# Altium PCB STM32.PcbDoc (part 8 of 10)
Units mil, origin at the board's own origin, x right, y up, seen from the top; angles counter-clockwise.
Board outline 3925 x 3925 mil, 2 copper layers (Top Layer, Bottom Layer); 152 components, 142 nets, 670 pads, 189 vias.
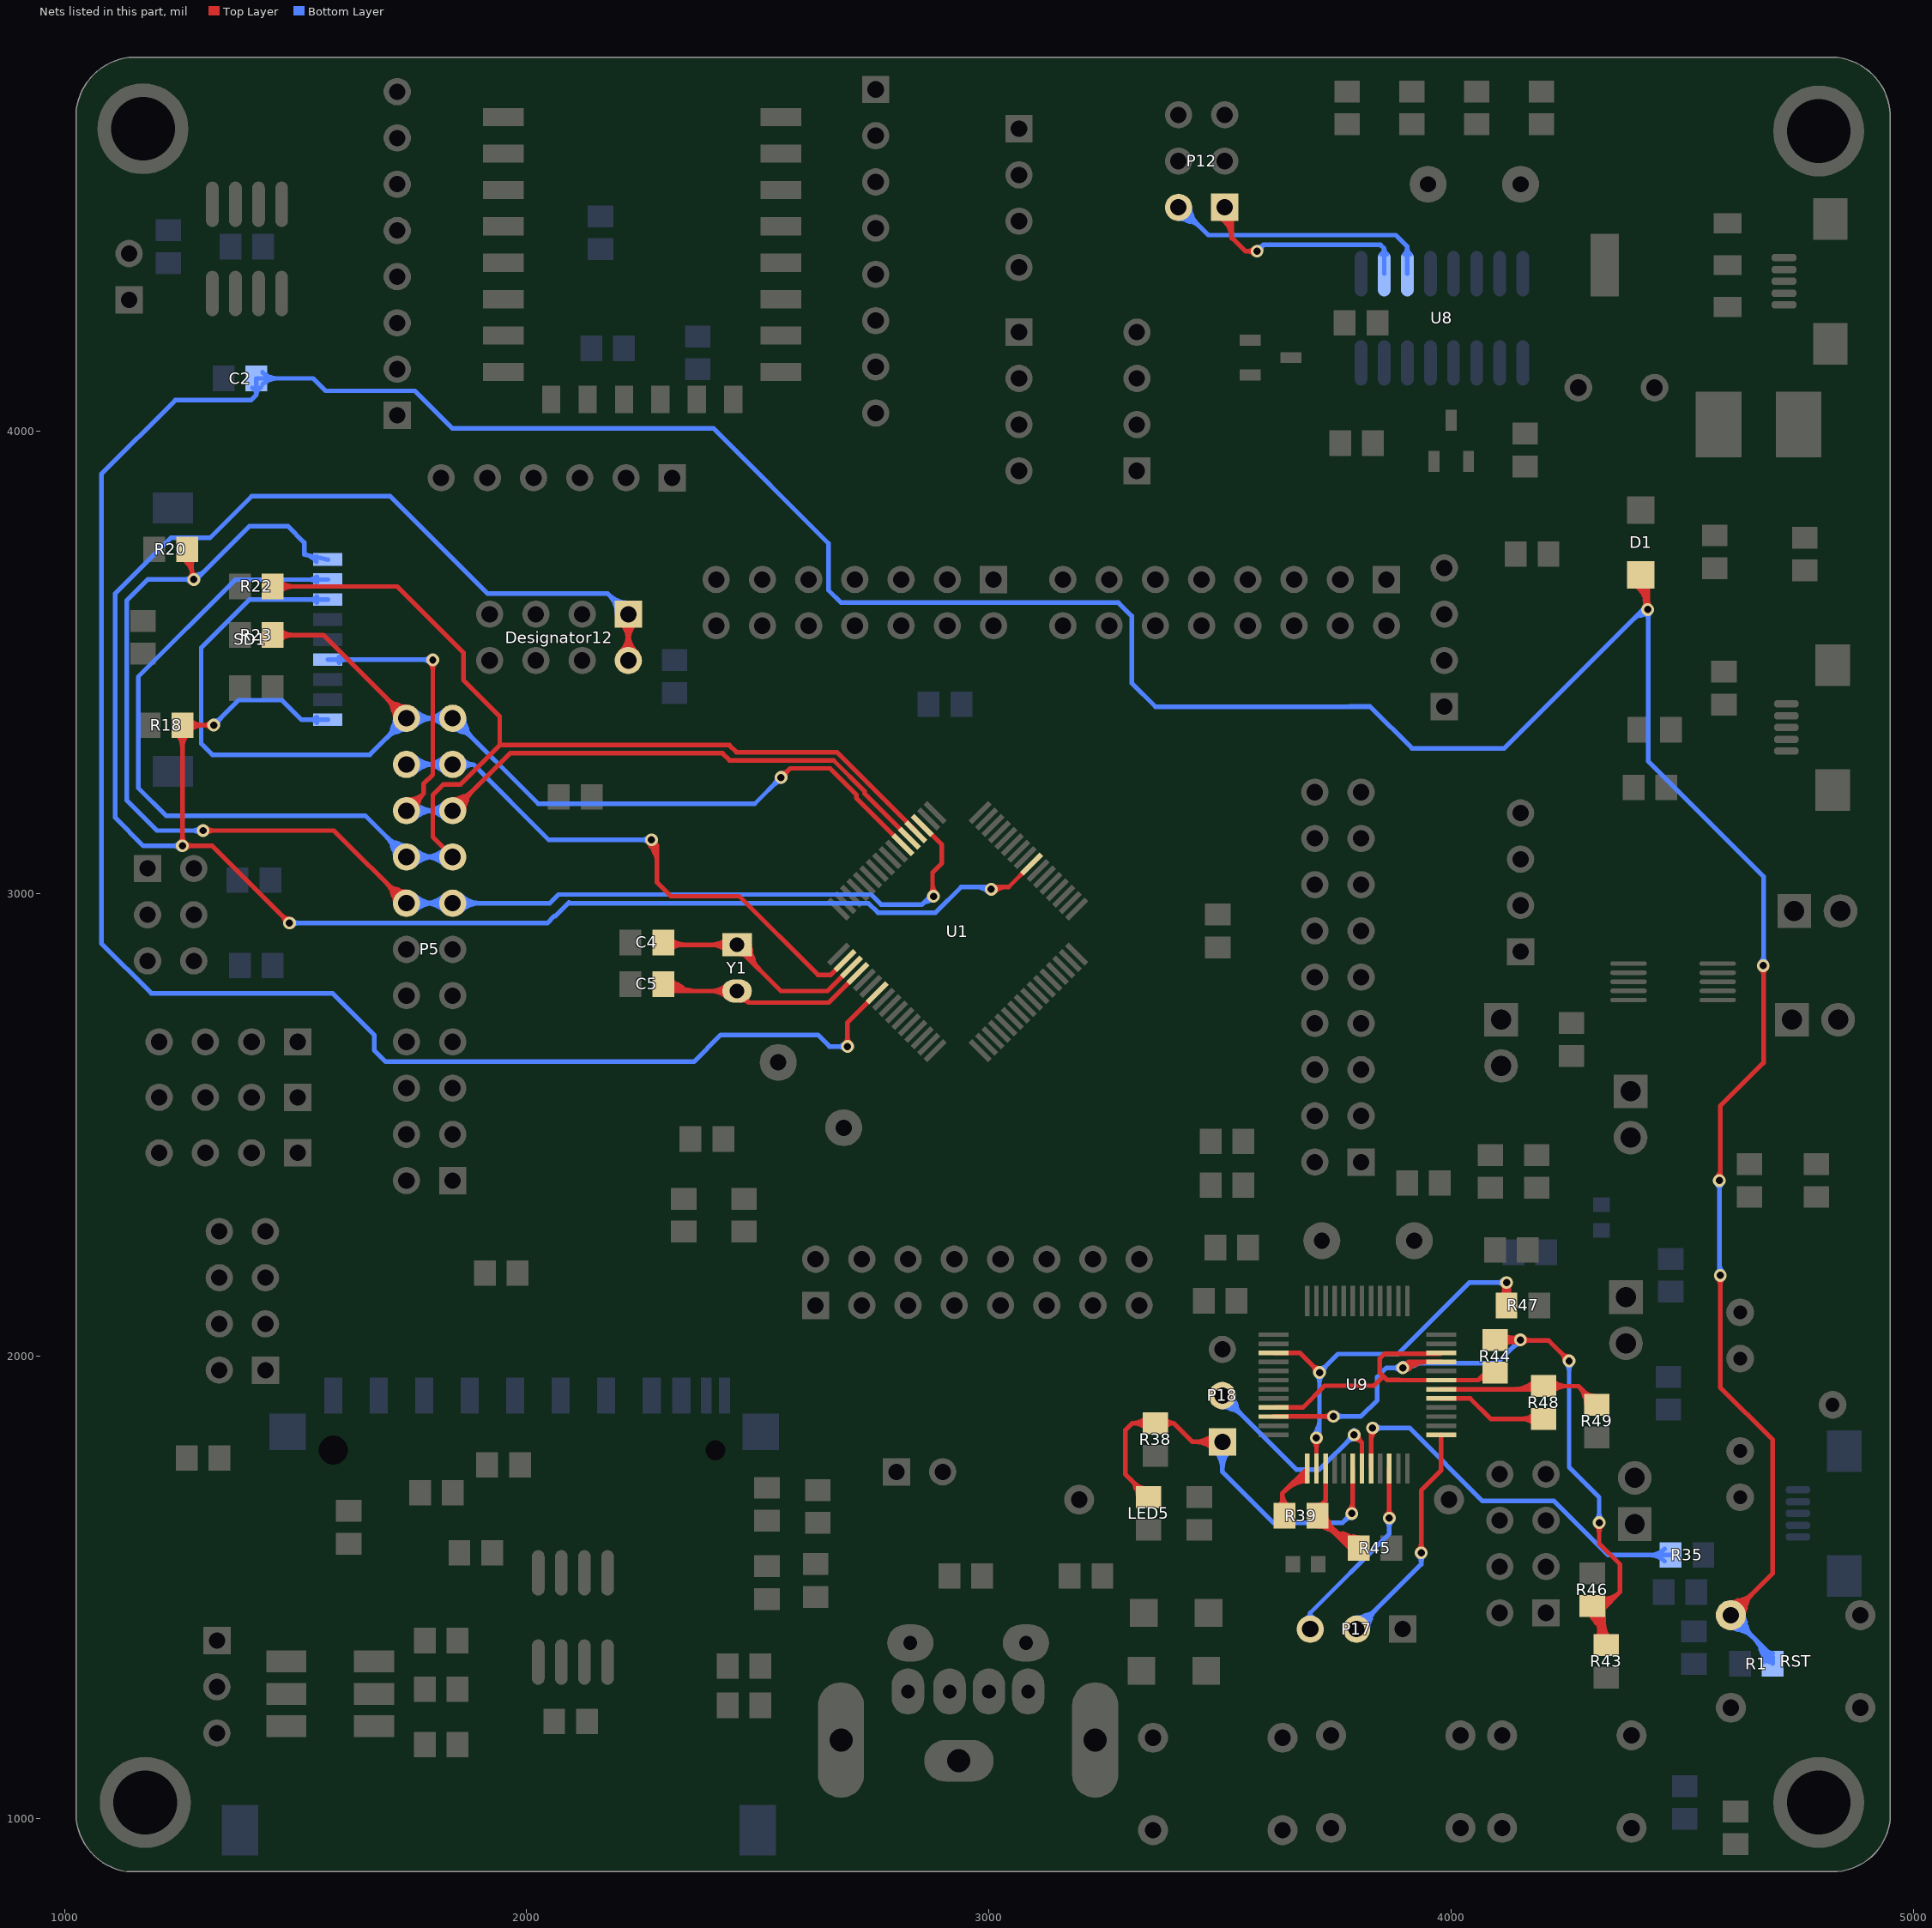
[diagram p8: the nets of this part, all layers, seen from the top]

## Via types
v1: diameter 27.56, hole 15.75, Top Layer to Bottom Layer, tented both sides, 185 vias
v2: diameter 39.37, hole 23.62, Top Layer to Bottom Layer, tented both sides, 3 vias
v3: diameter 39.37, hole 27.56, Top Layer to Bottom Layer, tented both sides, 1 vias

## Nets (pads, with @x,y where several pads share a name; then routed paths per layer and width w, separated by ;. In a path a pad name is that pad's centre, name@x,y a point inside that pad or via, vN(x,y) a via of type N, cw(c..) or ccw(c..) an arc to the next point about the centre after c; other vN are vias at no path point) (continued)
PC9: Designator12.1 Designator12.2 R18.2 SD1.8 U1.40 | length 5851.6
  Top Layer w10: R18.2@1242.27,3347.9 cw(c1210.48,3316.11) 1255.43,3316.11 cw(c1300.39,3316.11) R18.2@1268.6,3347.9 ; v1@1249.23,3110.21 ccw(c1234.24,3125.2) 1255.43,3125.2 ccw(c1276.63,3125.2) 1261.64,3110.21 ccw(c1276.63,3125.2) 1276.63,3104 ccw(c1276.63,3082.8) v1@1261.64,3097.79 ; R18.2@1268.6,3351.83 cw(c1300.39,3320.04) 1300.39,3365 cw(c1300.39,3409.96) R18.2@1268.6,3378.17 ; v1(1323,3365) R18.2@1255.43,3365 v1(1255.43,3104) 1320,3104 v1(1487,2937) ; 1475.77,2946.15 ccw(c1489.64,2949.87) v1@1486.76,2935.8 ; 1477.85,2948.23 cw(c1474.13,2934.36) v1@1488.2,2937.24 ; Designator12.2@2202.66,3522.34 ccw(c2160.79,3564.21) 2220,3564.21 ccw(c2279.21,3564.21) Designator12.2@2237.34,3522.34 ; Designator12.1@2202.66,3587.66 cw(c2160.79,3545.79) 2220,3545.79 cw(c2279.21,3545.79) Designator12.1@2237.34,3587.66 ; Designator12.2@2209.73,3515.27 ccw(c2184.93,3540.07) 2220,3540.07 ccw(c2255.07,3540.07) Designator12.2@2230.27,3515.27 ; Designator12.1@2209.73,3594.73 cw(c2184.93,3569.93) 2220,3569.93 cw(c2255.07,3569.93) Designator12.1@2230.27,3594.73 ; Designator12.2@2220,3505 Designator12.1@2220,3605 ; v1@3003,3015 3042.71,3015 U1.40@3092.58,3064.87 ; 1301.8,3365 ccw(c1301.8,3386.2) 1316.79,3371.21 cw(c1301.8,3386.2) 1301.8,3365 ; 1301.8,3365 cw(c1301.8,3343.8) 1316.79,3358.79 ccw(c1301.8,3343.8) 1301.8,3365 ; 1472.01,2951.99 ccw(c1487,2966.98) 1487,2945.78 cw(c1487,2966.98) 1472.01,2951.99 ; 1472.01,2951.99 cw(c1457.02,2937) 1478.22,2937 ccw(c1457.02,2937) 1472.01,2951.99 ; v1@3011.21,3003.79 cw(c3038.27,2976.73) 3038.27,3015 ; v1@3011.21,3003.79 cw(c3038.27,2976.73) 3038.27,3015 ; v1@3011.21,3003.79 cw(c3038.27,2976.73) 3038.27,3015
  Bottom Layer w10: v1@1249.23,3097.79 ccw(c1234.24,3082.8) 1234.24,3104 ccw(c1234.24,3125.2) v1@1249.23,3110.21 ; v1(1255.43,3104) 1171,3104 1110,3165 1110,3650 1230,3770 1315,3770 1405,3860 1705,3860 1915,3650 2175,3650 Designator12.1@2220,3605 ; v1(1323,3365) 1377,3419 1470.77,3419 1513,3376.77 SD1.8@1570,3376.77 ; v1(1487,2937) 2045,2937 2060,2952 2062,2952 2091.26,2981.26 2092.52,2980 2739.18,2980 2759.76,2959.42 2884.42,2959.42 2940,3015 v1@3003,3015 ; Designator12.1@2195.47,3605 ccw(c2136.26,3605) 2178.13,3646.87 ccw(c2220,3688.74) Designator12.1@2220,3629.53 ; Designator12.1@2205.47,3605 ccw(c2170.4,3605) 2195.2,3629.8 ccw(c2220,3654.6) Designator12.1@2220,3619.53 ; 1337.99,3379.99 ccw(c1352.98,3365) 1331.78,3365 cw(c1352.98,3365) 1337.99,3379.99 ; 1337.99,3379.99 cw(c1323,3394.98) 1323,3373.78 ccw(c1323,3394.98) 1337.99,3379.99 ; 1508.2,2937 ccw(c1508.2,2915.8) 1493.21,2930.79 cw(c1508.2,2915.8) 1508.2,2937 ; 1508.2,2937 cw(c1508.2,2958.2) 1493.21,2943.21 ccw(c1508.2,2958.2) 1508.2,2937 ; 1531.09,3376.77 ccw(c1531.09,3397.97) 1546.08,3382.98 cw(c1531.09,3397.97) 1531.09,3376.77 ; 1531.09,3376.77 cw(c1531.09,3355.58) 1546.08,3370.56 ccw(c1531.09,3355.58) 1531.09,3376.77 ; 2971.73,3015 cw(c2971.73,2976.73) 2998.79,3003.79 ccw(c2971.73,2976.73) 2971.73,3015
  other v1: 3005,3010
PC10: P5.13 P5.14 R20.2 SD1.9 U1.51 | length 5014.2
  Top Layer w10: R20.2@1265.43,3745 v1(1280,3680) ; v1(1300,3137) 1583,3137 P5.14@1740,2980 ; v1@1306.21,3130.79 cw(c1321.2,3115.8) 1321.2,3137 cw(c1321.2,3158.2) v1@1306.21,3143.21 ; 1709.48,3002.35 ccw(c1746.61,3012.3) P5.14@1738.9,2974.64 ; 1717.65,3010.52 cw(c1707.7,2973.39) P5.14@1745.36,2981.1 ; U1.51@2855.95,3148.39 2898.26,3106.08 2898.26,3066.55 2878,3046.29 v1@2878,3000 ; 1275.37,3700.68 ccw(c1296.05,3705.32) 1284.7,3687.42 cw(c1296.05,3705.32) 1275.37,3700.68 ; 1275.37,3700.68 cw(c1254.68,3696.05) 1272.58,3684.7 ccw(c1254.68,3696.05) 1275.37,3700.68 ; 1698.13,3021.87 ccw(c1740,3063.74) 1740,3004.53 cw(c1740,3063.74) 1698.13,3021.87 ; 1698.13,3021.87 cw(c1656.26,2980) 1715.47,2980 ccw(c1656.26,2980) 1698.13,3021.87 ; 1715.2,3004.8 ccw(c1740,3029.6) 1740,2994.53 cw(c1740,3029.6) 1715.2,3004.8 ; 1715.2,3004.8 cw(c1690.4,2980) 1725.47,2980 ccw(c1690.4,2980) 1715.2,3004.8 ; R20.2@1255.46,3725.33 cw(c1229.82,3684.88) 1276.56,3695.35 ccw(c1229.82,3684.88) R20.2@1255.46,3725.33 ; 1275.65,3699.41 cw(c1316.65,3708.6) 1281.16,3731.09 ccw(c1316.65,3708.6) 1275.65,3699.41 ; v1@2873.79,3001.21 ccw(c2863.63,3011.37) 2878,3011.37 cw(c2863.63,3011.37) v1@2873.79,3001.21 ; 2878,3021.02 ccw(c2906.02,3021.02) 2886.21,3001.21 cw(c2906.02,3021.02) 2878,3021.02
  Bottom Layer w10: v1@1278.86,3680.45 cw(c1296.63,3673.48) 1291.69,3691.91 ; v1@1293.79,3130.79 ccw(c1278.8,3115.8) 1278.8,3137 ccw(c1278.8,3158.2) v1@1293.79,3143.21 ; v1(1300,3137) 1200,3137 1135,3202 1135,3635 1180,3680 v1(1280,3680) 1285,3680 1400,3795 1484,3795 1519,3760 1519,3734.23 SD1.9@1570,3723.23 ; 1532.5,3729.7 ccw(c1539.43,3737.35) SD1.9@1546.37,3729.72 ; P5.14@1740,2980 P5.13@1840,2980 2050,2980 2068.74,2998.74 2611.26,2998.74 2611.33,2998.67 2745.23,2998.67 2763.9,2980 2767,2976.9 2854.9,2976.9 ; v1@2878,3000 2854.9,2976.9 ; 1258.8,3680 ccw(c1258.8,3701.2) 1273.79,3686.21 cw(c1258.8,3701.2) 1258.8,3680 ; 1258.8,3680 cw(c1258.8,3658.8) 1273.79,3673.79 ccw(c1258.8,3658.8) 1258.8,3680 ; 1775.07,2980 ccw(c1775.07,2944.93) 1750.27,2969.73 cw(c1775.07,2944.93) 1775.07,2980 ; 1775.07,2980 cw(c1775.07,3015.07) 1750.27,2990.27 ccw(c1775.07,3015.07) 1775.07,2980 ; 1780.79,2980 ccw(c1780.79,3039.21) 1822.66,2997.34 cw(c1780.79,3039.21) 1780.79,2980 ; 1780.79,2980 cw(c1780.79,2920.79) 1822.66,2962.66 ccw(c1780.79,2920.79) 1780.79,2980 ; 1799.21,2980 ccw(c1799.21,2920.79) 1757.34,2962.66 cw(c1799.21,2920.79) 1799.21,2980 ; 1799.21,2980 cw(c1799.21,3039.21) 1757.34,2997.34 ccw(c1799.21,3039.21) 1799.21,2980 ; 1804.93,2980 ccw(c1804.93,3015.07) 1829.73,2990.27 cw(c1804.93,3015.07) 1804.93,2980 ; 1804.93,2980 cw(c1804.93,2944.93) 1829.73,2969.73 ccw(c1804.93,2944.93) 1804.93,2980 ; 1875.07,2980 ccw(c1875.07,2944.93) 1850.27,2969.73 cw(c1875.07,2944.93) 1875.07,2980 ; 1875.07,2980 cw(c1875.07,3015.07) 1850.27,2990.27 ccw(c1875.07,3015.07) 1875.07,2980 ; 1899.21,2980 ccw(c1899.21,2920.79) 1857.34,2962.66 cw(c1899.21,2920.79) 1899.21,2980 ; 1899.21,2980 cw(c1899.21,3039.21) 1857.34,2997.34 ccw(c1899.21,3039.21) 1899.21,2980 ; 2854.9,2976.9 cw(c2877.58,2954.22) v1@2879.48,2986.24 ; 2854.9,2976.9 cw(c2877.58,2954.22) v1@2879.48,2986.24 ; 2854.9,2976.9 cw(c2877.58,2954.22) v1@2879.48,2986.24 ; v1@1280,3688.78 ccw(c1280,3722.05) 1303.52,3698.52 cw(c1280,3722.05) v1@1280,3688.78 ; 1523.54,3733.25 cw(c1516.38,3700.06) 1544.91,3718.47 ccw(c1516.38,3700.06) 1523.54,3733.25 ; 2865.78,2983.42 ccw(c2861.14,3006.01) 2881.05,2994.38 cw(c2861.14,3006.01) 2865.78,2983.42
  other v1: 2880,2995
PC11: P5.15 P5.16 R22.2 SD1.1 U1.52 | length 4685.7
  Top Layer w10: R22.2@1450.43,3665 1720,3665 1862.99,3522.01 1862.99,3462.99 1941.79,3384.2 1941.79,3321.79 ; P5.15@1840,3080 1797,3123 1797,3214 1820,3237 1857,3237 1941.79,3321.79 ; U1.52@2842.03,3134.47 2842.03,3135.88 2671.39,3306.52 2453.58,3306.52 2438.31,3321.79 1941.79,3321.79 ; 1495.39,3665 ccw(c1495.39,3620.04) 1463.6,3651.83 cw(c1495.39,3620.04) 1495.39,3665 ; 1495.39,3665 cw(c1495.39,3709.96) 1463.6,3678.17 ccw(c1495.39,3709.96) 1495.39,3665
  Bottom Layer w10: SD1.1@1570,3679.92 1369.92,3679.92 1160,3470 1160,3229.11 1220,3169.11 1650.89,3169.11 P5.16@1740,3080 P5.15@1840,3080 ; 1709.48,3102.35 ccw(c1746.61,3112.3) P5.16@1738.9,3074.64 ; 1717.65,3110.52 cw(c1707.7,3073.39) P5.16@1745.36,3081.1 ; 1531.09,3679.92 ccw(c1531.09,3701.12) 1546.08,3686.13 cw(c1531.09,3701.12) 1531.09,3679.92 ; 1531.09,3679.92 cw(c1531.09,3658.73) 1546.08,3673.71 ccw(c1531.09,3658.73) 1531.09,3679.92 ; 1698.13,3121.87 ccw(c1740,3163.74) 1740,3104.53 cw(c1740,3163.74) 1698.13,3121.87 ; 1698.13,3121.87 cw(c1656.26,3080) 1715.47,3080 ccw(c1656.26,3080) 1698.13,3121.87 ; 1715.2,3104.8 ccw(c1740,3129.6) 1740,3094.53 cw(c1740,3129.6) 1715.2,3104.8 ; 1715.2,3104.8 cw(c1690.4,3080) 1725.47,3080 ccw(c1690.4,3080) 1715.2,3104.8 ; 1775.07,3080 ccw(c1775.07,3044.93) 1750.27,3069.73 cw(c1775.07,3044.93) 1775.07,3080 ; 1775.07,3080 cw(c1775.07,3115.07) 1750.27,3090.27 ccw(c1775.07,3115.07) 1775.07,3080 ; 1780.79,3080 ccw(c1780.79,3139.21) 1822.66,3097.34 cw(c1780.79,3139.21) 1780.79,3080 ; 1780.79,3080 cw(c1780.79,3020.79) 1822.66,3062.66 ccw(c1780.79,3020.79) 1780.79,3080 ; 1799.21,3080 ccw(c1799.21,3020.79) 1757.34,3062.66 cw(c1799.21,3020.79) 1799.21,3080 ; 1799.21,3080 cw(c1799.21,3139.21) 1757.34,3097.34 ccw(c1799.21,3139.21) 1799.21,3080 ; 1804.93,3080 ccw(c1804.93,3115.07) 1829.73,3090.27 cw(c1804.93,3115.07) 1804.93,3080 ; 1804.93,3080 cw(c1804.93,3044.93) 1829.73,3069.73 ccw(c1804.93,3044.93) 1804.93,3080
PC12: P5.17 P5.18 SD1.5 U1.53 | length 3211.9
  Top Layer w10: P5.18@1740,3180 1777,3217 ; v1(1797,3506) 1797,3258 1777,3238 1777,3217 ; P5.17@1834.64,3181.1 cw(c1872.3,3173.39) 1862.35,3210.52 ; P5.17@1840,3180 1964.31,3304.31 2423.51,3304.31 2438.78,3289.04 2664.16,3289.04 2664.16,3288.75 2730.74,3222.16 2730.74,3217.93 U1.53@2828.12,3120.55 ; P5.17@1841.1,3174.64 ccw(c1833.39,3212.3) 1870.52,3202.35 ; 1761.91,3201.91 ccw(c1780.15,3183.68) 1754.47,3181.32 cw(c1780.15,3183.68) 1761.91,3201.91 ; 1761.91,3201.91 cw(c1743.68,3220.15) 1741.32,3194.47 ccw(c1743.68,3220.15) 1761.91,3201.91 ; 1777,3217 ccw(c1807.79,3186.21) 1764.43,3182.24 cw(c1807.79,3186.21) 1777,3217 ; 1777,3217 cw(c1746.21,3247.79) 1742.24,3204.43 ccw(c1746.21,3247.79) 1777,3217 ; 1797,3484.8 ccw(c1775.8,3484.8) 1790.79,3499.79 cw(c1775.8,3484.8) 1797,3484.8 ; 1797,3484.8 cw(c1818.2,3484.8) 1803.21,3499.79 ccw(c1818.2,3484.8) 1797,3484.8 ; 1864.8,3204.8 ccw(c1889.6,3180) 1854.53,3180 cw(c1889.6,3180) 1864.8,3204.8 ; 1864.8,3204.8 cw(c1840,3229.6) 1840,3194.53 ccw(c1840,3229.6) 1864.8,3204.8 ; 1881.87,3221.87 ccw(c1923.74,3180) 1864.53,3180 cw(c1923.74,3180) 1881.87,3221.87 ; 1881.87,3221.87 cw(c1840,3263.74) 1840,3204.53 ccw(c1840,3263.74) 1881.87,3221.87
  Bottom Layer w10: SD1.5@1570,3506.69 1796.31,3506.69 v1(1797,3506) ; P5.18@1740,3180 P5.17@1840,3180 ; 1608.91,3506.69 ccw(c1608.91,3485.5) 1593.92,3500.49 cw(c1608.91,3485.5) 1608.91,3506.69 ; 1608.91,3506.69 cw(c1608.91,3527.89) 1593.92,3512.9 ccw(c1608.91,3527.89) 1608.91,3506.69 ; 1775.07,3180 ccw(c1775.07,3144.93) 1750.27,3169.73 cw(c1775.07,3144.93) 1775.07,3180 ; 1775.07,3180 cw(c1775.07,3215.07) 1750.27,3190.27 ccw(c1775.07,3215.07) 1775.07,3180 ; 1780.79,3180 ccw(c1780.79,3239.21) 1822.66,3197.34 cw(c1780.79,3239.21) 1780.79,3180 ; 1780.79,3180 cw(c1780.79,3120.79) 1822.66,3162.66 ccw(c1780.79,3120.79) 1780.79,3180 ; 1799.21,3180 ccw(c1799.21,3120.79) 1757.34,3162.66 cw(c1799.21,3120.79) 1799.21,3180 ; 1799.21,3180 cw(c1799.21,3239.21) 1757.34,3197.34 ccw(c1799.21,3239.21) 1799.21,3180 ; 1804.93,3180 ccw(c1804.93,3215.07) 1829.73,3190.27 cw(c1804.93,3215.07) 1804.93,3180 ; 1804.93,3180 cw(c1804.93,3144.93) 1829.73,3169.73 ccw(c1804.93,3144.93) 1804.93,3180 ; 1774.13,3506.69 cw(c1774.13,3483.13) 1790.79,3499.79 ccw(c1774.13,3483.13) 1774.13,3506.69 ; 1777.48,3506.69 ccw(c1777.48,3525.52) 1790.79,3512.21 cw(c1777.48,3525.52) 1777.48,3506.69
PC13: P5.19 P5.20 U1.2 | length 2247.2
  Top Layer w10: 2268.88,3101.98 cw(c2282.32,3109.74) v1@2268.95,3117.62 ; v1@2268.89,3108.29 cw(c2266.82,3091.98) 2281.06,3100.2 ; v1(2270,3117) 2282.02,3104.98 ; 2277.45,3087.14 cw(c2299.28,3099.74) v1@2277.56,3112.54 ; v1@2278.48,3114.73 ccw(c2295.07,3110.28) 2280.2,3101.7 ; U1.2@2688.92,2856.08 2657.84,2825 2630,2825 2460,2995 2312,2995 2282.02,3024.98 2282.02,3104.98 ; 2282.02,3104.98 ccw(c2273.49,3096.45) 2271.47,3108.34 cw(c2273.49,3096.45) 2282.02,3104.98 ; 2282.02,3104.98 cw(c2290.55,3113.51) 2278.66,3115.53 ccw(c2290.55,3113.51) 2282.02,3104.98 ; v1@2263.79,3110.79 cw(c2219.79,3066.79) 2282.02,3066.79 ccw(c2219.79,3066.79) v1@2263.79,3110.79 ; v1@2270.86,3117.86 cw(c2243.93,3090.93) 2282.02,3090.93 ccw(c2243.93,3090.93) v1@2270.86,3117.86
  Bottom Layer w10: P5.20@1740,3280 P5.19@1840,3280 1885,3280 ; v1(2270,3117) 2048,3117 1885,3280 ; 1775.07,3280 ccw(c1775.07,3244.93) 1750.27,3269.73 cw(c1775.07,3244.93) 1775.07,3280 ; 1775.07,3280 cw(c1775.07,3315.07) 1750.27,3290.27 ccw(c1775.07,3315.07) 1775.07,3280 ; 1780.79,3280 ccw(c1780.79,3339.21) 1822.66,3297.34 cw(c1780.79,3339.21) 1780.79,3280 ; 1780.79,3280 cw(c1780.79,3220.79) 1822.66,3262.66 ccw(c1780.79,3220.79) 1780.79,3280 ; 1799.21,3280 ccw(c1799.21,3220.79) 1757.34,3262.66 cw(c1799.21,3220.79) 1799.21,3280 ; 1799.21,3280 cw(c1799.21,3339.21) 1757.34,3297.34 ccw(c1799.21,3339.21) 1799.21,3280 ; 1804.93,3280 ccw(c1804.93,3315.07) 1829.73,3290.27 cw(c1804.93,3315.07) 1804.93,3280 ; 1804.93,3280 cw(c1804.93,3244.93) 1829.73,3269.73 ccw(c1804.93,3244.93) 1804.93,3280 ; 1885,3280 ccw(c1885,3250.99) 1860.61,3266.71 cw(c1885,3250.99) 1885,3280 ; 1885,3280 cw(c1885,3309.01) 1860.61,3293.29 ccw(c1885,3309.01) 1885,3280 ; 2248.8,3117 ccw(c2248.8,3138.2) 2263.79,3123.21 cw(c2248.8,3138.2) 2248.8,3117 ; 2248.8,3117 cw(c2248.8,3095.8) 2263.79,3110.79 ccw(c2248.8,3095.8) 2248.8,3117
PC14: C4.2 U1.3 Y1.1 | length 1569
  Top Layer w10: Y1.1@2460.22,2880.16 cw(c2455.88,2856.24) 2479.36,2862.53 ; Y1.1@2462,2890 cw(c2444.02,2845.19) 2490.66,2857.69 ; Y1.1@2465.72,2899.28 cw(c2453.33,2868.39) Y1.1@2485.48,2877 ; Y1.1@2477.79,2868.39 cw(c2492.58,2872.35) Y1.1@2479.32,2880 ; U1.3@2702.84,2842.16 2650.68,2790 2550,2790 2455,2885 Y1.1@2455,2890 ; C4.2@2308.6,2877.9 cw(c2337.82,2848.68) 2337.82,2890 ; C4.2@2308.6,2877.9 cw(c2337.82,2848.68) 2337.82,2890 ; C4.2@2308.6,2877.9 cw(c2337.82,2848.68) 2337.82,2890 ; C4.2@2308.6,2877.9 cw(c2337.82,2848.68) 2337.82,2890 ; C4.2@2308.6,2904.23 ccw(c2342.96,2938.59) 2342.96,2890 ; C4.2@2308.6,2904.23 ccw(c2342.96,2938.59) 2342.96,2890 ; C4.2@2308.6,2904.23 ccw(c2342.96,2938.59) 2342.96,2890 ; C4.2@2308.6,2904.23 ccw(c2342.96,2938.59) 2342.96,2890 ; 2399.72,2890 ccw(c2399.72,2938.28) Y1.1@2433.86,2904.14 ; 2399.72,2890 cw(c2399.72,2841.72) Y1.1@2433.86,2875.86 ; 2399.72,2890 ccw(c2399.72,2938.28) Y1.1@2433.86,2904.14 ; 2399.72,2890 cw(c2399.72,2841.72) Y1.1@2433.86,2875.86 ; 2399.72,2890 ccw(c2399.72,2938.28) Y1.1@2433.86,2904.14 ; 2399.72,2890 cw(c2399.72,2841.72) Y1.1@2433.86,2875.86 ; 2399.72,2890 ccw(c2399.72,2938.28) Y1.1@2433.86,2904.14 ; 2399.72,2890 cw(c2399.72,2841.72) Y1.1@2433.86,2875.86 ; Y1.1@2455,2890 2295.43,2890 Y1.1@2455,2890 ; Y1.1@2462,2870 cw(c2462,2850.69) 2475.66,2864.34 ccw(c2462,2850.69) Y1.1@2462,2870 ; Y1.1@2472,2890 ccw(c2525.11,2890) 2487.56,2852.44 cw(c2525.11,2890) Y1.1@2472,2890 ; Y1.1@2482,2890 ccw(c2559.25,2890) 2504.63,2835.37 cw(c2559.25,2890) Y1.1@2482,2890
PC15: C5.2 U1.4 Y1.2 | length 1047.6
  Top Layer w10: C5.2@2294.25,2801.77 cw(c2309.93,2792.35) 2319.07,2808.19 ; C5.2@2302.82,2796.62 cw(c2318.65,2787.11) 2327.88,2803.1 ; C5.2@2310.44,2790 2320,2790 Y1.2@2455,2790 2480,2765 ; C5.2@2311.28,2791.28 cw(c2319.06,2786.48) 2323.63,2794.4 ; C5.2@2311.39,2791.47 cw(c2327.37,2781.87) 2336.7,2798.01 ; C5.2@2313.42,2805.88 ccw(c2329.38,2810.16) 2321.12,2795.85 ; U1.4@2716.76,2828.24 2653.52,2765 2480,2765 ; 2399.72,2790 ccw(c2399.72,2838.28) 2433.86,2804.14 cw(c2399.72,2838.28) 2399.72,2790 ; 2399.72,2790 cw(c2399.72,2741.72) 2433.86,2775.86 ccw(c2399.72,2741.72) 2399.72,2790 ; 2480,2765 ccw(c2467.1,2752.11) 2464.67,2770.18 cw(c2467.1,2752.11) 2480,2765 ; 2480,2765 cw(c2487.78,2772.78) 2478.63,2778.89 ccw(c2487.78,2772.78) 2480,2765 ; C5.2@2294.46,2800.09 ccw(c2318.82,2824.45) 2318.82,2790 cw(c2318.82,2824.45) C5.2@2294.46,2800.09 ; C5.2@2301.53,2807.16 ccw(c2342.96,2848.59) 2342.96,2790 cw(c2342.96,2848.59) C5.2@2301.53,2807.16 ; C5.2@2308.6,2814.23 ccw(c2367.1,2872.74) 2367.1,2790 cw(c2367.1,2872.74) C5.2@2308.6,2814.23
PD2: P5.21 P5.22 R23.2 SD1.2 U1.54 | length 4641.4
  Top Layer w10: R23.2@1450.43,3560 1560,3560 P5.22@1740,3380 ; 1709.48,3402.35 ccw(c1746.61,3412.3) P5.22@1738.9,3374.64 ; 1717.65,3410.52 cw(c1707.7,3373.39) P5.22@1745.36,3381.1 ; v1(2550.16,3251.74) 2569.98,3271.55 2656.63,3271.55 2713.26,3214.92 2713.26,3207.57 U1.54@2814.2,3106.63 ; v1@2550.16,3260.52 ccw(c2550.16,3281.72) 2565.15,3266.73 ccw(c2580.14,3251.74) v1@2558.94,3251.74 ; 1495.39,3560 ccw(c1495.39,3515.04) 1463.6,3546.83 cw(c1495.39,3515.04) 1495.39,3560 ; 1495.39,3560 cw(c1495.39,3604.96) 1463.6,3573.17 ccw(c1495.39,3604.96) 1495.39,3560 ; 1698.13,3421.87 ccw(c1740,3463.74) 1740,3404.53 cw(c1740,3463.74) 1698.13,3421.87 ; 1698.13,3421.87 cw(c1656.26,3380) 1715.47,3380 ccw(c1656.26,3380) 1698.13,3421.87 ; 1715.2,3404.8 ccw(c1740,3429.6) 1740,3394.53 cw(c1740,3429.6) 1715.2,3404.8 ; 1715.2,3404.8 cw(c1690.4,3380) 1725.47,3380 ccw(c1690.4,3380) 1715.2,3404.8
  Bottom Layer w10: SD1.2@1570,3636.61 1400,3636.61 1296,3532.61 1296,3325 1320,3301 1661,3301 P5.22@1740,3380 P5.21@1840,3380 2025,3195 2493.42,3195 v1(2550.16,3251.74) ; 1709.48,3357.65 cw(c1746.61,3347.7) P5.22@1738.9,3385.36 ; 1717.65,3349.48 ccw(c1707.7,3386.61) P5.22@1745.36,3378.9 ; P5.21@1834.64,3378.9 ccw(c1872.3,3386.61) 1862.35,3349.48 ; P5.21@1841.1,3385.36 cw(c1833.39,3347.7) 1870.52,3357.65 ; v1@2541.38,3251.74 cw(c2520.19,3251.74) 2535.18,3236.75 cw(c2550.16,3221.76) v1@2550.16,3242.96 ; 1531.09,3636.61 ccw(c1531.09,3657.81) 1546.08,3642.82 cw(c1531.09,3657.81) 1531.09,3636.61 ; 1531.09,3636.61 cw(c1531.09,3615.42) 1546.08,3630.41 ccw(c1531.09,3615.42) 1531.09,3636.61 ; 1698.13,3338.13 ccw(c1656.26,3380) 1715.47,3380 cw(c1656.26,3380) 1698.13,3338.13 ; 1698.13,3338.13 cw(c1740,3296.26) 1740,3355.47 ccw(c1740,3296.26) 1698.13,3338.13 ; 1715.2,3355.2 ccw(c1690.4,3380) 1725.47,3380 cw(c1690.4,3380) 1715.2,3355.2 ; 1715.2,3355.2 cw(c1740,3330.4) 1740,3365.47 ccw(c1740,3330.4) 1715.2,3355.2 ; 1775.07,3380 ccw(c1775.07,3344.93) 1750.27,3369.73 cw(c1775.07,3344.93) 1775.07,3380 ; 1775.07,3380 cw(c1775.07,3415.07) 1750.27,3390.27 ccw(c1775.07,3415.07) 1775.07,3380 ; 1780.79,3380 ccw(c1780.79,3439.21) 1822.66,3397.34 cw(c1780.79,3439.21) 1780.79,3380 ; 1780.79,3380 cw(c1780.79,3320.79) 1822.66,3362.66 ccw(c1780.79,3320.79) 1780.79,3380 ; 1799.21,3380 ccw(c1799.21,3320.79) 1757.34,3362.66 cw(c1799.21,3320.79) 1799.21,3380 ; 1799.21,3380 cw(c1799.21,3439.21) 1757.34,3397.34 ccw(c1799.21,3439.21) 1799.21,3380 ; 1804.93,3380 ccw(c1804.93,3415.07) 1829.73,3390.27 cw(c1804.93,3415.07) 1804.93,3380 ; 1804.93,3380 cw(c1804.93,3344.93) 1829.73,3369.73 ccw(c1804.93,3344.93) 1804.93,3380 ; 1864.8,3355.2 ccw(c1840,3330.4) 1840,3365.47 cw(c1840,3330.4) 1864.8,3355.2 ; 1864.8,3355.2 cw(c1889.6,3380) 1854.53,3380 ccw(c1889.6,3380) 1864.8,3355.2 ; 1881.87,3338.13 ccw(c1840,3296.26) 1840,3355.47 cw(c1840,3296.26) 1881.87,3338.13 ; 1881.87,3338.13 cw(c1923.74,3380) 1864.53,3380 ccw(c1923.74,3380) 1881.87,3338.13
RESET: C2.1 D1.1 R1.2 RST.1 U1.7 | length 12386.1
  Top Layer w10: v1(2694,2670) 2694,2721.97 U1.7@2758.52,2786.48 ; D1.1@4410,3690 4425,3675 v1(4425,3615) ; v1(4582,2175) 4582,1933 4695,1820 4695,1530 RST.1@4605,1440 ; v1@4582,2380 4582,2541 4675.62,2634.62 v1@4675.62,2840 ; RST.1@4592.78,1442.5 cw(c4630.02,1434.88) 4620.19,1471.6 ; RST.1@4602.58,1440.5 cw(c4647.75,1431.25) 4635.82,1475.78 ; RST.1@4605.5,1437.58 ccw(c4596.25,1482.75) 4640.78,1470.82 ; RST.1@4607.5,1427.78 ccw(c4599.88,1465.02) 4636.6,1455.19 ; 2694,2691.2 ccw(c2715.2,2691.2) 2700.21,2676.21 cw(c2715.2,2691.2) 2694,2691.2 ; 2694,2691.2 cw(c2672.8,2691.2) 2687.79,2676.21 ccw(c2672.8,2691.2) 2694,2691.2 ; v1@4417.4,3619.39 ccw(c4400.17,3629.33) 4419.38,3634.48 ; v1@4417.4,3619.39 ccw(c4400.17,3629.33) 4419.38,3634.48 ; v1@4417.4,3619.39 ccw(c4400.17,3629.33) 4419.38,3634.48 ; 4418.9,3636.27 ccw(c4440.64,3642.09) v1@4429.39,3622.6 ; 4418.9,3636.27 ccw(c4440.64,3642.09) v1@4429.39,3622.6 ; 4418.9,3636.27 ccw(c4440.64,3642.09) v1@4429.39,3622.6 ; 4425,3636.2 ccw(c4446.2,3636.2) 4431.21,3621.21 cw(c4446.2,3636.2) 4425,3636.2 ; 4425,3636.2 cw(c4403.8,3636.2) 4418.79,3621.21 ccw(c4403.8,3636.2) 4425,3636.2 ; 4582,2153.8 ccw(c4560.8,2153.8) 4575.79,2168.79 cw(c4560.8,2153.8) 4582,2153.8 ; 4582,2153.8 cw(c4603.2,2153.8) 4588.21,2168.79 ccw(c4603.2,2153.8) 4582,2153.8 ; 4634.92,1469.92 ccw(c4664.84,1440) 4622.53,1440 cw(c4664.84,1440) 4634.92,1469.92 ; 4634.92,1469.92 cw(c4605,1499.84) 4605,1457.53 ccw(c4605,1499.84) 4634.92,1469.92 ; 4651.99,1486.99 ccw(c4698.98,1440) 4632.53,1440 cw(c4698.98,1440) 4651.99,1486.99 ; 4651.99,1486.99 cw(c4605,1533.98) 4605,1467.53 ccw(c4605,1533.98) 4651.99,1486.99 ; D1.1@4395.74,3669.47 cw(c4356.88,3613.52) 4425,3613.52 ccw(c4356.88,3613.52) D1.1@4395.74,3669.47 ; D1.1@4401.44,3677.68 cw(c4370.16,3632.64) 4425,3632.64 ccw(c4370.16,3632.64) D1.1@4401.44,3677.68 ; D1.1@4407.15,3685.89 cw(c4383.44,3651.76) 4425,3651.76 ccw(c4383.44,3651.76) D1.1@4407.15,3685.89 ; v1@4573.79,2386.21 ccw(c4553.98,2406.02) 4582,2406.02 cw(c4553.98,2406.02) v1@4573.79,2386.21 ; 4582,2396.37 ccw(c4596.37,2396.37) 4586.21,2386.21 cw(c4596.37,2396.37) 4582,2396.37 ; v1@4668.79,2838.79 cw(c4652.31,2822.31) 4675.62,2822.31 ccw(c4652.31,2822.31) v1@4668.79,2838.79 ; 4675.62,2825.3 cw(c4694.7,2825.3) 4681.21,2838.79 ccw(c4694.7,2825.3) 4675.62,2825.3
  Bottom Layer w10: v1(2694,2670) 2655.04,2670 2630,2695.04 2420.04,2695.04 2362,2637 1695,2637 1670,2662 1670,2695 1580,2785 1188,2785 1080,2893 1080,3907.87 1240,4067.87 1403.3,4067.87 1415.43,4080 ; 3780,3405.52 3824.48,3405.52 3915,3315 4114.76,3315 4420,3620.24 4420,3610.34 4426.26,3610.34 4426.26,3286.74 4675.62,3037.38 v1@4675.62,2845 ; 3824.48,3404.92 3360.08,3404.92 3308.93,3456.07 3308.93,3601.07 3280,3630 2680,3630 2653,3657 2653,3758 2404,4007 1839,4007 1758,4088 1565,4088 1538,4115 C2.1@1415.43,4115 1415.43,4080 ; 4410.65,3602.38 ccw(c4404.16,3626.58) v1@4426.07,3614.41 ; v1@4580,2177 v1(4580,2380) ; RST.1@4592.78,1437.5 ccw(c4630.02,1445.12) 4620.19,1408.4 ; RST.1@4602.58,1439.5 ccw(c4647.75,1448.75) 4635.82,1404.22 ; RST.1@4605,1440 4695.43,1349.57 R1.2@4695.43,1335 ; RST.1@4605.5,1442.42 cw(c4596.25,1397.25) 4640.78,1409.18 ; RST.1@4607.5,1452.22 cw(c4599.88,1414.98) 4636.6,1424.81 ; 4669.54,1366.06 ccw(c4710.38,1377.01) R1.2@4694.93,1337.65 ; 1415.43,4080 ccw(c1398.83,4080) 1406.66,4094.64 cw(c1398.83,4080) 1415.43,4080 ; 1415.43,4080 cw(c1432.03,4080) 1424.21,4094.64 ccw(c1432.03,4080) 1415.43,4080 ; 1460.39,4115 ccw(c1460.39,4070.04) 1428.6,4101.83 cw(c1460.39,4070.04) 1460.39,4115 ; 1460.39,4115 cw(c1460.39,4159.96) 1428.6,4128.17 ccw(c1460.39,4159.96) 1460.39,4115 ; 2672.8,2670 ccw(c2672.8,2691.2) 2687.79,2676.21 cw(c2672.8,2691.2) 2672.8,2670 ; 2672.8,2670 cw(c2672.8,2648.8) 2687.79,2663.79 ccw(c2672.8,2648.8) 2672.8,2670 ; 4580,2358.8 ccw(c4558.8,2358.8) 4573.79,2373.79 cw(c4558.8,2358.8) 4580,2358.8 ; 4580,2358.8 cw(c4601.2,2358.8) 4586.21,2373.79 ccw(c4601.2,2358.8) 4580,2358.8 ; 4634.92,1410.08 ccw(c4605,1380.16) 4605,1422.47 cw(c4605,1380.16) 4634.92,1410.08 ; 4634.92,1410.08 cw(c4664.84,1440) 4622.53,1440 ccw(c4664.84,1440) 4634.92,1410.08 ; 4651.99,1393.01 ccw(c4605,1346.02) 4605,1412.47 cw(c4605,1346.02) 4651.99,1393.01 ; 4651.99,1393.01 cw(c4698.98,1440) 4632.53,1440 ccw(c4698.98,1440) 4651.99,1393.01 ; 4392.54,3592.77 cw(c4425,3560.31) 4425,3606.22 ccw(c4425,3560.31) 4392.54,3592.77 ; 4409.61,3609.85 cw(c4425,3594.46) 4425,3616.22 ccw(c4425,3594.46) 4409.61,3609.85 ; v1@4418.79,3608.79 cw(c4400.76,3590.76) 4426.26,3590.76 ccw(c4400.76,3590.76) v1@4418.79,3608.79 ; 4426.26,3596.85 cw(c4443.15,3596.85) 4431.21,3608.79 ccw(c4443.15,3596.85) 4426.26,3596.85 ; v1@4575.79,2181.21 ccw(c4565.63,2191.37) 4580,2191.37 cw(c4565.63,2191.37) v1@4575.79,2181.21 ; 4580,2201.02 ccw(c4608.02,2201.02) 4588.21,2181.21 cw(c4608.02,2201.02) 4580,2201.02 ; 4656.13,1388.87 cw(c4606.19,1338.93) 4676.81,1338.93 ccw(c4606.19,1338.93) 4656.13,1388.87 ; v1@4668.79,2851.21 ccw(c4652.31,2867.69) 4675.62,2867.69 cw(c4652.31,2867.69) v1@4668.79,2851.21 ; 4673.2,1371.8 cw(c4640.33,1338.93) 4686.81,1338.93 ccw(c4640.33,1338.93) 4673.2,1371.8 ; 4675.62,2864.7 ccw(c4694.7,2864.7) 4681.21,2851.21 cw(c4694.7,2864.7) 4675.62,2864.7 ; 4681.79,1363.21 ccw(c4695.43,1376.85) 4695.43,1357.56 cw(c4695.43,1376.85) 4681.79,1363.21
  other v1: 4675,2845
RX: LED5.1 P18.1 R38.2 U9.30 | length 2083.2
  Top Layer w10: 3316.15,1718.9 ccw(c3350.15,1728.01) LED5.1@3340.69,1694.11 ; LED5.1@3345,1695.43 3295,1745.43 3295,1840 3310.43,1855.43 3350,1855.43 3399.57,1855.43 ; P18.1@3505,1815 3440,1815 3399.57,1855.43 ; v1(3785,1660) 3787.18,1662.18 U9.30@3787.18,1757.37 ; 3311.11,1855.43 ccw(c3311.11,1900.39) 3342.9,1868.6 cw(c3311.11,1900.39) 3311.11,1855.43 ; 3311.11,1855.43 cw(c3311.11,1810.48) 3342.9,1842.27 ccw(c3311.11,1810.48) 3311.11,1855.43 ; 3399.56,1855.43 ccw(c3399.56,1830.66) 3379.23,1844.8 cw(c3399.56,1830.66) 3399.56,1855.43 ; 3399.56,1855.43 cw(c3399.56,1880.2) 3379.23,1866.06 ccw(c3399.56,1880.2) 3399.56,1855.43 ; 3445.79,1815 ccw(c3445.79,1874.21) 3487.66,1832.34 cw(c3445.79,1874.21) 3445.79,1815 ; 3445.79,1815 cw(c3445.79,1755.79) 3487.66,1797.66 ccw(c3445.79,1755.79) 3445.79,1815 ; 3469.93,1815 ccw(c3469.93,1850.07) 3494.73,1825.27 cw(c3469.93,1850.07) 3469.93,1815 ; 3469.93,1815 cw(c3469.93,1779.93) 3494.73,1804.73 ccw(c3469.93,1779.93) 3469.93,1815 ; 3306.49,1733.94 cw(c3267.98,1695.43) 3322.44,1695.43 ccw(c3267.98,1695.43) 3306.49,1733.94 ; 3315.99,1724.44 ccw(c3341.06,1749.51) 3341.06,1714.06 cw(c3341.06,1749.51) 3315.99,1724.44 ; LED5.1@3323.56,1716.87 cw(c3302.12,1695.43) 3332.44,1695.43 ccw(c3302.12,1695.43) LED5.1@3323.56,1716.87 ; v1@3778.79,1666.21 ccw(c3758.54,1686.46) 3787.18,1686.46 cw(c3758.54,1686.46) v1@3778.79,1666.21 ; 3787.18,1675.93 ccw(c3800.93,1675.93) 3791.21,1666.21 cw(c3800.93,1675.93) 3787.18,1675.93
  Bottom Layer w10: P18.1@3505,1815 3505,1750 3615,1640 3765,1640 v1(3785,1660) ; 3505,1755.79 ccw(c3445.79,1755.79) 3487.66,1797.66 cw(c3445.79,1755.79) 3505,1755.79 ; 3505,1755.79 cw(c3564.21,1755.79) 3522.34,1797.66 ccw(c3564.21,1755.79) 3505,1755.79 ; 3505,1779.93 ccw(c3469.93,1779.93) 3494.73,1804.73 cw(c3469.93,1779.93) 3505,1779.93 ; 3505,1779.93 cw(c3540.07,1779.93) 3515.27,1804.73 ccw(c3540.07,1779.93) 3505,1779.93 ; 3770.01,1645.01 ccw(c3755.02,1660) 3776.22,1660 cw(c3755.02,1660) 3770.01,1645.01 ; 3770.01,1645.01 cw(c3785,1630.02) 3785,1651.22 ccw(c3785,1630.02) 3770.01,1645.01
RXD: P12.1 U8.2 | length 992.5
  Top Layer w10: P12.1@3520,4480 P12.1@3525,4475 ; v1(3580,4390) 3555,4390 3525,4420 P12.1@3525,4475 ; P12.1@3525,4475 3525,4480 P12.1@3525,4475 ; 3558.8,4390 ccw(c3558.8,4411.2) 3573.79,4396.21 cw(c3558.8,4411.2) 3558.8,4390 ; 3558.8,4390 cw(c3558.8,4368.8) 3573.79,4383.79 ccw(c3558.8,4368.8) 3558.8,4390 ; P12.1@3498.22,4463.49 cw(c3473.48,4418.29) 3525,4418.29 ccw(c3473.48,4418.29) P12.1@3498.22,4463.49 ; P12.1@3503.02,4472.26 cw(c3482.72,4435.17) 3525,4435.17 ccw(c3482.72,4435.17) P12.1@3503.02,4472.26 ; P12.1@3507.83,4481.03 cw(c3491.96,4452.05) 3525,4452.05 ccw(c3491.96,4452.05) P12.1@3507.83,4481.03
  Bottom Layer w10: v1(3580,4390) 3594,4404 ; v1@3580.38,4398.77 ccw(c3581.17,4417.06) 3594,4404 ; v1@3580.48,4398.77 ccw(c3581.46,4416.33) 3594,4404 ; v1@3588.77,4390.38 cw(c3607.06,4391.17) 3594,4404 ; v1@3588.77,4390.48 cw(c3606.33,4391.46) 3594,4404 ; U8.2@3855,4341.46 3855,4396 ; 3594,4404 ccw(c3606.68,4391.32) 3588.77,4390.43 cw(c3606.68,4391.32) 3594,4404 ; 3594,4404 cw(c3581.32,4416.68) 3580.43,4398.77 ccw(c3581.32,4416.68) 3594,4404 ; 3594,4404 3847,4404 3855,4396 ; 3855,4396 ccw(c3871.41,4396) 3860.72,4383.55 cw(c3871.41,4396) 3855,4396 ; 3855,4396 cw(c3838.59,4396) 3849.28,4383.55 ccw(c3838.59,4396) 3855,4396
SWCLK1: P17.2 U9.37 | length 1010.6
  Top Layer w10: v1(3935,1575) 3935,1710 3978.13,1753.13 U9.37@3978.13,1830.21 ; 3935,1596.2 ccw(c3956.2,1596.2) 3941.21,1581.21 cw(c3956.2,1596.2) 3935,1596.2 ; 3935,1596.2 cw(c3913.8,1596.2) 3928.79,1581.21 ccw(c3913.8,1596.2) 3935,1596.2
  Bottom Layer w10: P17.2@3789.64,1411.1 cw(c3827.3,1403.39) 3817.35,1440.52 ; P17.2@3795,1410 3935,1550 v1(3935,1575) ; P17.2@3796.1,1404.64 ccw(c3788.39,1442.3) 3825.52,1432.35 ; 3819.8,1434.8 ccw(c3844.6,1410) 3809.53,1410 cw(c3844.6,1410) 3819.8,1434.8 ; 3819.8,1434.8 cw(c3795,1459.6) 3795,1424.53 ccw(c3795,1459.6) 3819.8,1434.8 ; 3836.87,1451.87 ccw(c3878.74,1410) 3819.53,1410 cw(c3878.74,1410) 3836.87,1451.87 ; 3836.87,1451.87 cw(c3795,1493.74) 3795,1434.53 ccw(c3795,1493.74) 3836.87,1451.87 ; 3935,1553.8 ccw(c3913.8,1553.8) 3928.79,1568.79 cw(c3913.8,1553.8) 3935,1553.8 ; 3935,1553.8 cw(c3956.2,1553.8) 3941.21,1568.79 ccw(c3956.2,1553.8) 3935,1553.8
SWDIO1: P17.3 U9.34 | length 613.5
  Top Layer w10: v1(3865.92,1650) U9.34@3865.92,1757.37 ; 3865.92,1671.2 ccw(c3887.12,1671.2) 3872.13,1656.21 cw(c3887.12,1671.2) 3865.92,1671.2 ; 3865.92,1671.2 cw(c3844.73,1671.2) 3859.71,1656.21 ccw(c3844.73,1671.2) 3865.92,1671.2
  Bottom Layer w10: P17.3@3695,1410 3695,1445 ; v1(3865.92,1650) 3865.92,1615.92 3695,1445 ; 3695,1445 ccw(c3707.71,1445) 3703.37,1433.06 cw(c3707.71,1445) 3695,1445 ; 3695,1445 cw(c3682.29,1445) 3686.63,1433.06 ccw(c3682.29,1445) 3695,1445 ; 3865.92,1628.8 ccw(c3844.73,1628.8) 3859.71,1643.79 cw(c3844.73,1628.8) 3865.92,1628.8 ; 3865.92,1628.8 cw(c3887.12,1628.8) 3872.13,1643.79 ccw(c3887.12,1628.8) 3865.92,1628.8
SWIM: R43.2 R44.2 R46.2 U9.22 U9.45 | length 4972.3
  Top Layer w10: U9.22@3616.35,1870 v1(3745,1870) ; v1@3894.42,1973.93 ccw(c3902.26,1988.32) 3910.45,1974.13 ; v1(3895,1975) 3907.69,1987.69 ; v1@3897.27,1983.48 ccw(c3901.72,2000.07) 3910.3,1985.2 ; v1@3899.2,1982.71 ccw(c3912.25,2006.66) 3925.88,1983.04 ; v1@3903.65,1973.51 cw(c3922.27,1970.29) 3912.82,1986.65 ; U9.45@3978.13,1987.69 3907.69,1987.69 ; R44.2@4095,2035.43 v1(4149.57,2035.43) 4150.83,2034.17 4210.83,2034.17 v1(4255,1990) ; 4243.77,1999.15 ccw(c4257.64,2002.87) v1@4254.76,1988.8 ; 4245.85,2001.23 cw(c4242.13,1987.36) v1@4256.2,1990.24 ; R46.2@4301.18,1467.89 cw(c4324.33,1443.06) R46.2@4325.51,1476.99 ; R46.2@4305,1459.57 4309.57,1455 R46.2@4330,1455 ; R46.2@4306.25,1441.14 cw(c4303.87,1424.79) 4317.12,1434.67 ; 4306.3,1433.17 cw(c4323.12,1445.89) R46.2@4307.95,1460.52 ; 4313.36,1423.84 cw(c4331.65,1437.67) R46.2@4315.14,1453.58 ; R46.2@4315.68,1436.6 cw(c4327.47,1445.39) R46.2@4315.79,1454.33 ; v1(4320,1640) 4320,1595 4365,1550 4365,1490 ; 4320.42,1414.51 cw(c4340.18,1429.45) R46.2@4322.34,1446.64 ; R46.2@4322.55,1472.27 ccw(c4334.64,1483.54) 4334.06,1467.02 ; 4323.59,1425.98 cw(c4338.4,1437.03) R46.2@4323.73,1448.25 ; R43.2@4330,1380.43 R46.2@4330,1455 ; 3723.8,1870 ccw(c3723.8,1891.2) 3738.79,1876.21 cw(c3723.8,1891.2) 3723.8,1870 ; 3723.8,1870 cw(c3723.8,1848.8) 3738.79,1863.79 ccw(c3723.8,1848.8) 3723.8,1870 ; 3907.69,1987.69 ccw(c3917.54,1977.83) 3903.71,1976.09 cw(c3917.54,1977.83) 3907.69,1987.69 ; 3907.69,1987.69 cw(c3897.83,1997.54) 3896.09,1983.71 ccw(c3897.83,1997.54) 3907.69,1987.69 ; 4125.29,2030.45 cw(c4132.07,2005.13) v1@4145.18,2027.83 ; 4125.29,2030.45 cw(c4132.07,2005.13) v1@4145.18,2027.83 ; 4125.29,2030.45 cw(c4132.07,2005.13) v1@4145.18,2027.83 ; 4125.29,2040.42 ccw(c4132.07,2065.73) v1@4145.18,2043.04 ; 4125.29,2040.42 ccw(c4132.07,2065.73) v1@4145.18,2043.04 ; 4125.29,2040.42 ccw(c4132.07,2065.73) v1@4145.18,2043.04 ; 4128.37,2035.43 ccw(c4128.37,2056.63) 4143.36,2041.64 cw(c4128.37,2056.63) 4128.37,2035.43 ; 4128.37,2035.43 cw(c4128.37,2014.24) 4143.36,2029.23 ccw(c4128.37,2014.24) 4128.37,2035.43 ; 4132.14,2032.28 ccw(c4127.95,2047.92) v1@4141.96,2039.82 ; 4132.14,2032.28 ccw(c4127.95,2047.92) v1@4141.96,2039.82 ; 4132.14,2032.28 ccw(c4127.95,2047.92) v1@4141.96,2039.82 ; 4132.14,2038.58 cw(c4127.95,2022.95) v1@4141.96,2031.04 ; 4132.14,2038.58 cw(c4127.95,2022.95) v1@4141.96,2031.04 ; 4132.14,2038.58 cw(c4127.95,2022.95) v1@4141.96,2031.04 ; v1@4143.89,2035.43 ccw(c4143.89,1990.48) 4112.1,2022.27 cw(c4143.89,1990.48) v1@4143.89,2035.43 ; v1@4143.89,2035.43 cw(c4143.89,2080.39) 4112.1,2048.6 ccw(c4143.89,2080.39) v1@4143.89,2035.43 ; 4240.01,2004.99 ccw(c4255,2019.98) 4255,1998.78 cw(c4255,2019.98) 4240.01,2004.99 ; 4240.01,2004.99 cw(c4225.02,1990) 4246.22,1990 ccw(c4225.02,1990) 4240.01,2004.99 ; R43.2@4314.94,1384.75 ccw(c4277.32,1406.46) 4319.28,1417.71 ; R43.2@4314.94,1384.75 ccw(c4277.32,1406.46) 4319.28,1417.71 ; R43.2@4314.94,1384.75 ccw(c4277.32,1406.46) 4319.28,1417.71 ; R43.2@4316.96,1387.6 ccw(c4288.83,1411.86) 4325.06,1420.08 ; R43.2@4316.96,1387.6 ccw(c4288.83,1411.86) 4325.06,1420.08 ; R43.2@4316.96,1387.6 ccw(c4288.83,1411.86) 4325.06,1420.08 ; 4318.72,1419.78 ccw(c4363.61,1431.81) R43.2@4340.37,1391.56 ; 4318.72,1419.78 ccw(c4363.61,1431.81) R43.2@4340.37,1391.56 ; 4318.72,1419.78 ccw(c4363.61,1431.81) R43.2@4340.37,1391.56 ; 4320,1618.8 ccw(c4298.8,1618.8) 4313.79,1633.79 cw(c4298.8,1618.8) 4320,1618.8 ; 4320,1618.8 cw(c4341.2,1618.8) 4326.21,1633.79 ccw(c4341.2,1618.8) 4320,1618.8 ; R43.2@4324.53,1381.07 ccw(c4307.48,1395.78) 4329.44,1400.77 ; R43.2@4324.53,1381.07 ccw(c4307.48,1395.78) 4329.44,1400.77 ; R43.2@4324.53,1381.07 ccw(c4307.48,1395.78) 4329.44,1400.77 ; 4327.19,1410.68 ccw(c4357.62,1417.59) R43.2@4340.99,1391.19 ; 4327.19,1410.68 ccw(c4357.62,1417.59) R43.2@4340.99,1391.19 ; 4327.19,1410.68 ccw(c4357.62,1417.59) R43.2@4340.99,1391.19 ; R46.2@4330,1455 4365,1490 ; 4365,1490 cw(c4329.18,1525.81) 4314.38,1477.37 ccw(c4329.18,1525.81) 4365,1490 ; v1@3894.14,1975.86 cw(c3922.68,1947.32) 3922.68,1987.69 ccw(c3922.68,1947.32) v1@3894.14,1975.86 ; v1@3901.21,1968.79 cw(c3946.82,1923.18) 3946.82,1987.69 ccw(c3946.82,1923.18) v1@3901.21,1968.79 ; v1@4155.77,2029.23 cw(c4167.72,2017.28) 4167.72,2034.17 ccw(c4167.72,2017.28) v1@4155.77,2029.23 ; v1@4155.77,2041.64 ccw(c4173.8,2059.67) 4173.8,2034.17 cw(c4173.8,2059.67) v1@4155.77,2041.64 ; R46.2@4297.4,1444.95 cw(c4244.3,1377.68) 4330,1377.68 ccw(c4244.3,1377.68) R46.2@4297.4,1444.95 ; R46.2@4303.59,1452.8 cw(c4260.59,1398.31) 4330,1398.31 ccw(c4260.59,1398.31) R46.2@4303.59,1452.8 ; R46.2@4308.53,1458.25 ccw(c4318.16,1489.75) 4341.46,1466.46 cw(c4318.16,1489.75) R46.2@4308.53,1458.25 ; R46.2@4309.79,1460.65 cw(c4276.87,1418.95) 4330,1418.95 ccw(c4276.87,1418.95) R46.2@4309.79,1460.65 ; R46.2@4311.46,1467.81 ccw(c4323.67,1507.78) 4353.23,1478.23 cw(c4323.67,1507.78) R46.2@4311.46,1467.81 ; R46.2@4315.99,1468.5 cw(c4293.16,1439.58) 4330,1439.58 ccw(c4293.16,1439.58) R46.2@4315.99,1468.5 ; R43.2@4317.9,1388.6 ccw(c4288.67,1417.83) 4330,1417.83 cw(c4288.67,1417.83) R43.2@4317.9,1388.6 ; 4330,1422.96 ccw(c4378.59,1422.96) 4344.23,1388.6 cw(c4378.59,1422.96) 4330,1422.96
  Bottom Layer w10: v1(3745,1870) 3805,1870 3840,1905 3840,1955 3860,1975 v1(3895,1975) ; v1(4149.57,2035.43) 4099.13,1985 ; v1(4255,1990) 4255,1760 4320,1695 v1(4320,1640) ; 3766.2,1870 ccw(c3766.2,1848.8) 3751.21,1863.79 cw(c3766.2,1848.8) 3766.2,1870 ; 3766.2,1870 cw(c3766.2,1891.2) 3751.21,1876.21 ccw(c3766.2,1891.2) 3766.2,1870 ; 3873.8,1975 ccw(c3873.8,1996.2) 3888.79,1981.21 cw(c3873.8,1996.2) 3873.8,1975 ; 3873.8,1975 cw(c3873.8,1953.8) 3888.79,1968.79 ccw(c3873.8,1953.8) 3873.8,1975 ; v1@3894.14,1975.86 cw(c3916.2,1953.8) 3916.2,1985 ; v1@3894.14,1975.86 cw(c3916.2,1953.8) 3916.2,1985 ; v1@3894.14,1975.86 cw(c3916.2,1953.8) 3916.2,1985 ; v1@3894.14,1975.86 cw(c3916.2,1953.8) 3916.2,1985 ; v1@3901.21,1968.79 cw(c3940.34,1929.66) 3940.34,1985 ; v1@3901.21,1968.79 cw(c3940.34,1929.66) 3940.34,1985 ; v1@3901.21,1968.79 cw(c3940.34,1929.66) 3940.34,1985 ; v1@3901.21,1968.79 cw(c3940.34,1929.66) 3940.34,1985 ; 4099.13,1985 3895,1985 4099.13,1985 ; 4134.58,2020.45 ccw(c4119.59,2035.43) 4140.79,2035.43 cw(c4119.59,2035.43) 4134.58,2020.45 ; 4134.58,2020.45 cw(c4149.57,2005.46) 4149.57,2026.65 ccw(c4149.57,2005.46) 4134.58,2020.45 ; 4255,1968.8 ccw(c4233.8,1968.8) 4248.79,1983.79 cw(c4233.8,1968.8) 4255,1968.8 ; 4255,1968.8 cw(c4276.2,1968.8) 4261.21,1983.79 ccw(c4276.2,1968.8) 4255,1968.8 ; 4320,1661.2 ccw(c4341.2,1661.2) 4326.21,1646.21 cw(c4341.2,1661.2) 4320,1661.2 ; 4320,1661.2 cw(c4298.8,1661.2) 4313.79,1646.21 ccw(c4298.8,1661.2) 4320,1661.2 ; v1@3894.26,1974.03 ccw(c3902.17,1984.47) 3908.72,1973.13 cw(c3902.17,1984.47) v1@3894.26,1974.03 ; v1@3900.3,1982 ccw(c3912.04,1997.52) 3921.77,1980.67 cw(c3912.04,1997.52) v1@3900.3,1982
SWIM_IN: R44.1 U9.21 U9.43 U9.46 | length 798.5
  Top Layer w10: U9.21@3615.92,1889.26 3679.26,1889.26 3726.26,1936.26 3832.94,1936.26 3853.34,1956.66 ; U9.46@3978.13,2007.37 3975.92,2005.17 3855.17,2005.17 3845,1995 3845,1965 3853.34,1956.66 ; R44.1@4095,1964.57 4074.57,1964.57 4058.32,1948.32 ; 3853.34,1956.66 3861.26,1948.74 3887.89,1948.74 3888.32,1948.32 U9.43@3978.13,1948.32 4058.32,1948.32 ; 4058.32,1948.32 cw(c4069.87,1936.76) 4079.77,1949.76 ccw(c4069.87,1936.76) 4058.32,1948.32 ; 3945.31,2005.17 ccw(c3945.31,2012.69) 3950.63,2007.37 cw(c3945.31,2012.69) 3945.31,2005.17 ; 4066.41,1956.41 cw(c4076.87,1945.94) 4085.84,1957.71 ccw(c4076.87,1945.94) 4066.41,1956.41
SWIM_RST: R48.2 R49.2 U9.42 | length 934.3
  Top Layer w10: U9.42@3978.13,1928.63 4062.11,1928.63 4062.27,1928.46 4193.03,1928.46 R48.2@4200,1935.43 4275,1935.43 R49.2@4315,1895.43 ; 4286.15,1918.9 ccw(c4320.15,1928.01) R49.2@4310.69,1894.11 ; 4248.89,1935.43 ccw(c4248.89,1890.48) 4217.1,1922.27 cw(c4248.89,1890.48) 4248.89,1935.43 ; 4248.89,1935.43 cw(c4248.89,1980.39) 4217.1,1948.6 ccw(c4248.89,1980.39) 4248.89,1935.43 ; 4134.28,1928.46 ccw(c4134.28,1997.22) 4182.9,1948.6 cw(c4134.28,1997.22) 4134.28,1928.46 ; 4158.42,1928.46 ccw(c4158.42,1973.08) 4189.97,1941.53 cw(c4158.42,1973.08) 4158.42,1928.46 ; 4167.93,1928.46 cw(c4167.93,1907.3) 4182.9,1922.27 ccw(c4167.93,1907.3) 4167.93,1928.46 ; 4276.49,1933.94 cw(c4237.98,1895.43) 4292.44,1895.43 ccw(c4237.98,1895.43) 4276.49,1933.94 ; 4285.99,1924.44 ccw(c4311.06,1949.51) 4311.06,1914.06 cw(c4311.06,1949.51) 4285.99,1924.44 ; R49.2@4293.56,1916.87 cw(c4272.12,1895.43) 4302.44,1895.43 ccw(c4272.12,1895.43) R49.2@4293.56,1916.87
SWIM_RST_IN: R48.1 U9.41 | length 381.5
  Top Layer w10: U9.41@3978.13,1908.95 4041.05,1908.95 4085.43,1864.57 R48.1@4200,1864.57 ; 4151.11,1864.57 ccw(c4151.11,1909.53) 4182.9,1877.74 cw(c4151.11,1909.53) 4151.11,1864.57 ; 4151.11,1864.57 cw(c4151.11,1819.61) 4182.9,1851.4 ccw(c4151.11,1819.61) 4151.11,1864.57
T_JTCK: R47.2 U9.15 U9.26 | length 1749.3
  Top Layer w10: U9.15@3615.92,2007.37 3672.63,2007.37 v1(3715,1965) ; 3703.77,1974.15 ccw(c3717.64,1977.87) v1@3714.76,1963.8 ; 3705.85,1976.23 cw(c3702.13,1962.36) v1@3716.2,1965.24 ; U9.26@3708.44,1757.37 v1(3708.44,1823.44) v1@3715,1830 ; R47.2@4119.57,2110 v1(4119.57,2159.57) ; 3700.01,1979.99 ccw(c3715,1994.98) 3715,1973.78 cw(c3715,1994.98) 3700.01,1979.99 ; 3700.01,1979.99 cw(c3685.02,1965) 3706.22,1965 ccw(c3685.02,1965) 3700.01,1979.99 ; 3708.44,1802.24 ccw(c3687.24,1802.24) 3702.23,1817.23 cw(c3687.24,1802.24) 3708.44,1802.24 ; 3708.44,1802.24 cw(c3729.64,1802.24) 3714.65,1817.23 ccw(c3729.64,1802.24) 3708.44,1802.24 ; v1@4111.96,2155.18 cw(c4093.09,2144.28) 4114.14,2138.64 ; v1@4111.96,2155.18 cw(c4093.09,2144.28) 4114.14,2138.64 ; v1@4111.96,2155.18 cw(c4093.09,2144.28) 4114.14,2138.64 ; 4114.36,2139.45 cw(c4134.26,2134.12) v1@4123.96,2151.96 ; 4114.36,2139.45 cw(c4134.26,2134.12) v1@4123.96,2151.96 ; 4114.36,2139.45 cw(c4134.26,2134.12) v1@4123.96,2151.96 ; v1@4115.18,2151.96 cw(c4104.88,2134.12) 4124.78,2139.45 ; v1@4115.18,2151.96 cw(c4104.88,2134.12) 4124.78,2139.45 ; v1@4115.18,2151.96 cw(c4104.88,2134.12) 4124.78,2139.45 ; 4119.57,2138.37 ccw(c4098.37,2138.37) 4113.36,2153.36 cw(c4098.37,2138.37) 4119.57,2138.37 ; 4119.57,2138.37 cw(c4140.76,2138.37) 4125.77,2153.36 ccw(c4140.76,2138.37) 4119.57,2138.37 ; v1@4119.57,2158.89 ccw(c4164.52,2158.89) 4132.73,2127.1 cw(c4164.52,2158.89) v1@4119.57,2158.89 ; v1@4119.57,2158.89 cw(c4074.61,2158.89) 4106.4,2127.1 ccw(c4074.61,2158.89) v1@4119.57,2158.89 ; 4124.99,2138.64 cw(c4146.04,2144.28) v1@4127.17,2155.18 ; 4124.99,2138.64 cw(c4146.04,2144.28) v1@4127.17,2155.18 ; 4124.99,2138.64 cw(c4146.04,2144.28) v1@4127.17,2155.18
  Bottom Layer w10: 3711.07,1844.95 ccw(c3720.91,1839.26) v1@3713.87,1830.34 ; v1@3715,1830 v1(3715,1965) 3755,2005 3885,2005 4039.57,2159.57 v1(4119.57,2159.57) ; 3715,1943.8 ccw(c3693.8,1943.8) 3708.79,1958.79 cw(c3693.8,1943.8) 3715,1943.8 ; 3715,1943.8 cw(c3736.2,1943.8) 3721.21,1958.79 ccw(c3736.2,1943.8) 3715,1943.8 ; 3729.99,1979.99 ccw(c3744.98,1965) 3723.78,1965 cw(c3744.98,1965) 3729.99,1979.99 ; 3729.99,1979.99 cw(c3715,1994.98) 3715,1973.78 ccw(c3715,1994.98) 3729.99,1979.99 ; 4098.37,2159.57 ccw(c4098.37,2180.76) 4113.36,2165.77 cw(c4098.37,2180.76) 4098.37,2159.57 ; 4098.37,2159.57 cw(c4098.37,2138.37) 4113.36,2153.36 ccw(c4098.37,2138.37) 4098.37,2159.57 ; v1@3702.23,1829.65 ccw(c3671.41,1860.47) 3715,1860.47 cw(c3671.41,1860.47) v1@3702.23,1829.65 ; v1@3709.3,1822.58 ccw(c3695.55,1836.33) 3715,1836.33 cw(c3695.55,1836.33) v1@3709.3,1822.58
T_JTMS: R39.1 R45.2 U9.27 | length 1355.5
  Top Layer w10: R39.1@3701.82,1643.63 ccw(c3727.52,1665.81) R39.1@3725.03,1631.95 ; R39.1@3705.43,1665 3728.13,1687.69 ; R39.1@3709.11,1650.69 ccw(c3743.01,1660.15) 3733.9,1626.15 ; R39.1@3710.1,1652.4 cw(c3715.5,1630.83) 3735.51,1640.51 ; R39.1@3710.43,1655 R45.2@3780.43,1585 ; R39.1@3712.53,1642.7 cw(c3718.55,1618.65) 3740.86,1629.44 ; U9.27@3728.13,1757.37 3728.13,1687.69 ; 3765.63,1616.65 cw(c3750.68,1560.88) R45.2@3800.76,1589.62 ; 3767.54,1606.14 cw(c3758.02,1570.61) R45.2@3791.68,1585.46 ; R45.2@3777.72,1603.41 ccw(c3781.99,1619.37) R45.2@3790.26,1605.06 ; R45.2@3781,1587.49 ccw(c3773.72,1586.93) 3775.61,1593.98 ccw(c3777.25,1600.09) R45.2@3782.91,1597.26 ; R45.2@3788.86,1610.43 cw(c3780.11,1577.77) R45.2@3809.43,1594.6 ; R39.1@3713.92,1632.77 cw(c3721.38,1593.65) 3743.77,1626.59 ; R39.1@3713.92,1632.77 cw(c3721.38,1593.65) 3743.77,1626.59 ; R39.1@3713.92,1632.77 cw(c3721.38,1593.65) 3743.77,1626.59 ; R39.1@3718.9,1652.68 ccw(c3744.39,1657.54) R39.1@3729.81,1636.08 ; R39.1@3718.9,1652.68 ccw(c3744.39,1657.54) R39.1@3729.81,1636.08 ; R39.1@3718.9,1652.68 ccw(c3744.39,1657.54) R39.1@3729.81,1636.08 ; 3728.13,1687.69 ccw(c3738.73,1677.09) 3726.11,1668.99 cw(c3738.73,1677.09) 3728.13,1687.69 ; R39.1@3728.73,1654.55 ccw(c3777.93,1663.94) 3749.77,1622.51 ; R39.1@3728.73,1654.55 ccw(c3777.93,1663.94) 3749.77,1622.51 ; R39.1@3728.73,1654.55 ccw(c3777.93,1663.94) 3749.77,1622.51 ; R39.1@3710.43,1632.44 cw(c3710.43,1577.98) 3748.94,1616.49 ccw(c3710.43,1577.98) R39.1@3710.43,1632.44 ; R39.1@3710.43,1642.44 cw(c3710.43,1612.12) 3731.87,1633.56 ccw(c3710.43,1612.12) R39.1@3710.43,1642.44 ; R39.1@3710.43,1677.56 ccw(c3710.43,1695.81) 3723.34,1682.9 cw(c3710.43,1695.81) R39.1@3710.43,1677.56 ; R39.1@3728.39,1637.04 ccw(c3799.57,1708.21) 3799.57,1607.56 cw(c3799.57,1708.21) R39.1@3728.39,1637.04 ; R39.1@3729.06,1651.06 ccw(c3764.51,1651.06) 3739.44,1625.99 cw(c3764.51,1651.06) R39.1@3729.06,1651.06 ; 3745.47,1619.97 ccw(c3799.57,1674.07) 3799.57,1597.56 cw(c3799.57,1674.07) 3745.47,1619.97 ; 3762.54,1602.9 ccw(c3799.57,1639.93) 3799.57,1587.56 cw(c3799.57,1639.93) 3762.54,1602.9
T_SWDIO_IN: R39.2 U9.25 | length 469
  Top Layer w10: R39.2@3634.57,1665 3634.57,1703.18 ; U9.25@3688.76,1757.37 3634.57,1703.18 ; 3634.57,1703.18 ccw(c3669.19,1703.18) 3649.93,1674.41 cw(c3669.19,1703.18) 3634.57,1703.18 ; R39.2@3626.4,1672.1 ccw(c3606.68,1691.82) 3634.57,1691.82 cw(c3606.68,1691.82) R39.2@3626.4,1672.1 ; 3634.57,1684.45 ccw(c3656.65,1684.45) 3644.36,1666.1 cw(c3656.65,1684.45) 3634.57,1684.45 ; 3641.81,1710.43 cw(c3688.75,1663.48) 3688.76,1729.87 ccw(c3688.75,1663.48) 3641.81,1710.43 ; 3658.88,1727.5 cw(c3688.76,1697.62) 3688.76,1739.87 ccw(c3688.76,1697.62) 3658.88,1727.5 ; 3675.95,1744.57 cw(c3688.76,1731.76) 3688.76,1749.87 ccw(c3688.76,1731.76) 3675.95,1744.57
TX: P18.2 U9.31 | length 1022.4
  Top Layer w10: v1@3788.8,1829.76 ccw(c3802.87,1832.64) 3799.15,1818.77 ; v1(3790,1830) 3806.87,1813.13 U9.31@3806.87,1757.37 ; v1@3790.24,1831.2 cw(c3787.36,1817.13) 3801.23,1820.85 ; 3804.99,1815.01 ccw(c3790,1800.02) 3790,1821.22 cw(c3790,1800.02) 3804.99,1815.01 ; 3804.99,1815.01 cw(c3819.98,1830) 3798.78,1830 ccw(c3819.98,1830) 3804.99,1815.01
  Bottom Layer w10: P18.2@3499.64,1913.9 ccw(c3537.3,1921.61) 3527.35,1884.48 ; P18.2@3505,1915 3665,1755 3715,1755 v1(3790,1830) ; P18.2@3506.1,1920.36 cw(c3498.39,1882.7) 3535.52,1892.65 ; 3529.8,1890.2 ccw(c3505,1865.4) 3505,1900.47 cw(c3505,1865.4) 3529.8,1890.2 ; 3529.8,1890.2 cw(c3554.6,1915) 3519.53,1915 ccw(c3554.6,1915) 3529.8,1890.2 ; 3546.87,1873.13 ccw(c3505,1831.26) 3505,1890.47 cw(c3505,1831.26) 3546.87,1873.13 ; 3546.87,1873.13 cw(c3588.74,1915) 3529.53,1915 ccw(c3588.74,1915) 3546.87,1873.13 ; 3775.01,1815.01 ccw(c3760.02,1830) 3781.22,1830 cw(c3760.02,1830) 3775.01,1815.01 ; 3775.01,1815.01 cw(c3790,1800.02) 3790,1821.22 ccw(c3790,1800.02) 3775.01,1815.01 ; v1@3785,1835 3790,1840 v1@3785,1835
TXD: P12.2 U8.3 | length 988.6
  Bottom Layer w10: P12.2@3404.73,4483.54 ccw(c3445.6,4494.84) 3434.63,4453.87 ; P12.2@3410.69,4490.43 cw(c3406.32,4455.93) 3439.9,4464.93 ; P12.2@3420,4480 3475,4425 3880,4425 3905,4400 U8.3@3905,4341.46 ; 3905,4398.08 ccw(c3926.2,4398.08) 3911.21,4383.1 cw(c3926.2,4398.08) 3905,4398.08 ; 3905,4398.08 cw(c3883.8,4398.08) 3898.79,4383.1 ccw(c3883.8,4398.08) 3905,4398.08 ; P12.2@3410,4460.47 cw(c3410,4389.19) 3460.41,4439.59 ccw(c3410,4389.19) P12.2@3410,4460.47 ; P12.2@3410,4470.47 cw(c3410,4423.33) 3443.34,4456.66 ccw(c3410,4423.33) P12.2@3410,4470.47 ; P12.2@3434.53,4485 ccw(c3481.67,4485) 3448.34,4451.66 cw(c3481.67,4485) P12.2@3434.53,4485
USB_DM: R35.2 U9.32 | length 1107.1
  Top Layer w10: U9.32@3826.55,1757.37 3826.55,1841.55 v1(3830,1845) ; 3826.55,1815.48 cw(c3859.52,1815.48) 3836.21,1838.79 ccw(c3859.52,1815.48) 3826.55,1815.48
  Bottom Layer w10: v1(3830,1845) 3910,1845 4067.99,1687.01 4222.4,1687.01 4339.41,1570 R35.2@4474.57,1570 ; 3851.2,1845 ccw(c3851.2,1823.8) 3836.21,1838.79 cw(c3851.2,1823.8) 3851.2,1845 ; 3851.2,1845 cw(c3851.2,1866.2) 3836.21,1851.21 ccw(c3851.2,1866.2) 3851.2,1845 ; 4429.61,1570 ccw(c4429.61,1614.96) 4461.4,1583.17 cw(c4429.61,1614.96) 4429.61,1570 ; 4429.61,1570 cw(c4429.61,1525.04) 4461.4,1556.83 ccw(c4429.61,1525.04) 4429.61,1570